# Altium PCB dualPSUpcb.PcbDoc
Units mm, origin at the board's own origin, x right, y up, seen from the top; angles counter-clockwise.
Board outline 73.5 x 47.5 mm, 2 copper layers (Top Layer, Bottom Layer), stack 1.569 mm thick; 33 components, 16 nets, 108 pads, 16 vias.
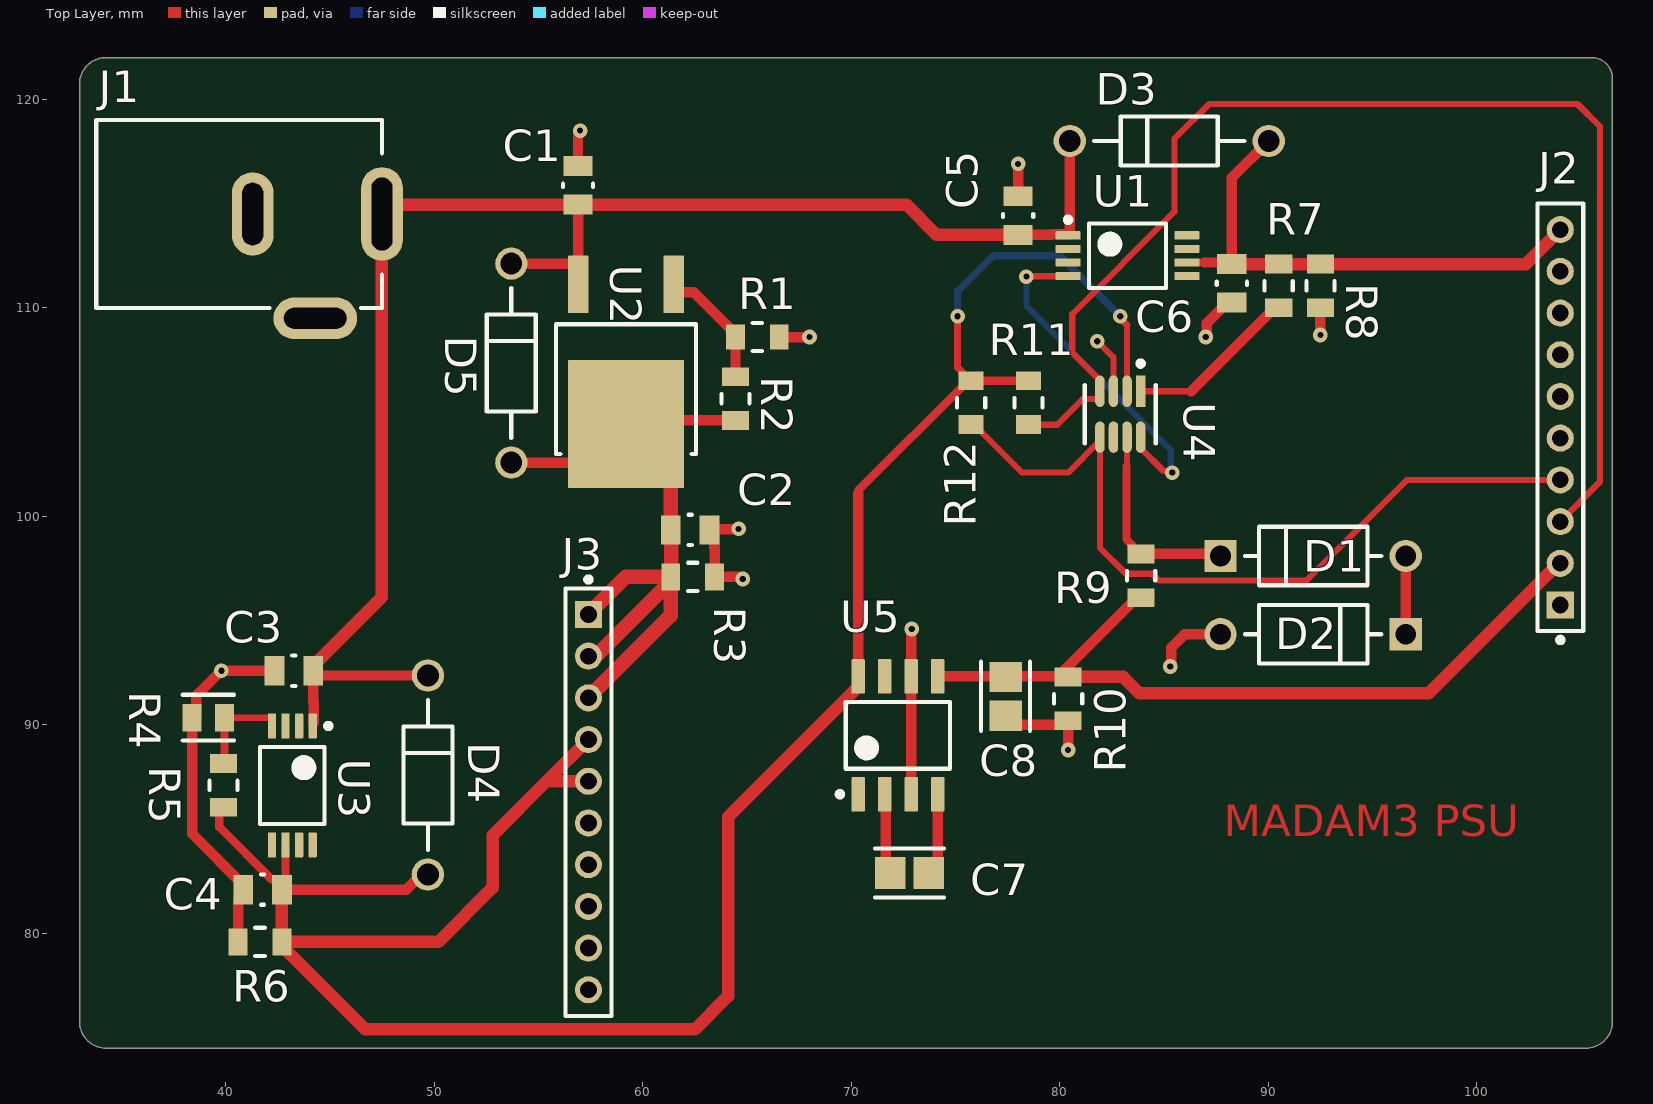
[diagram p0: Top Layer view]
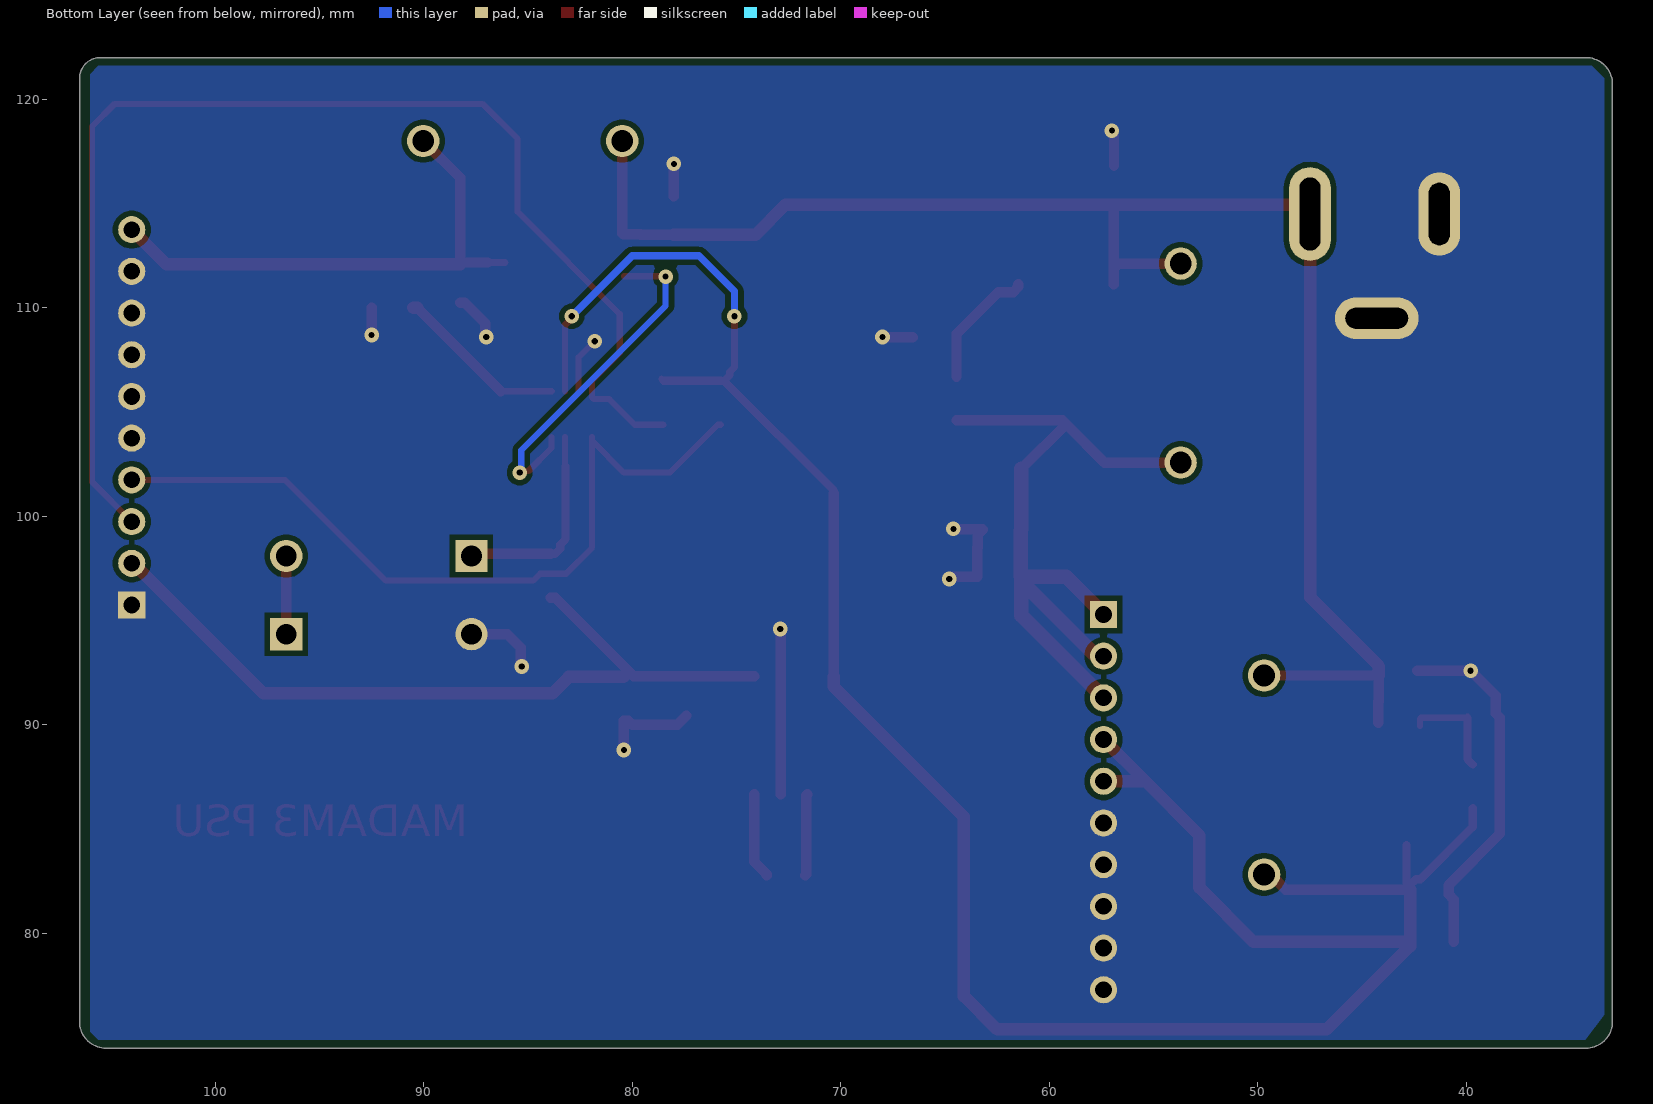
[diagram p1: Bottom Layer view, seen from below]
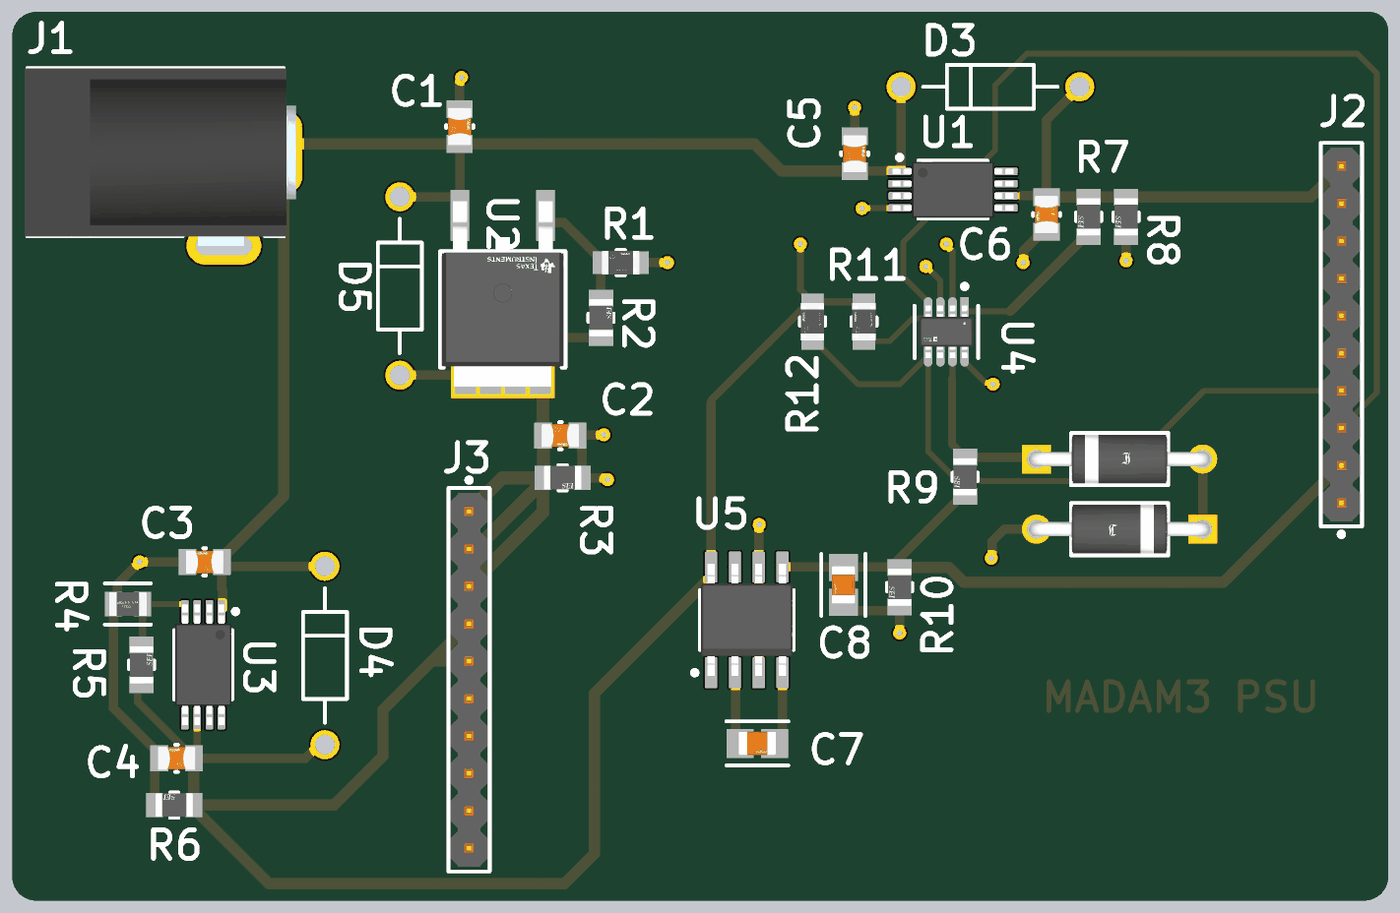
[diagram p2: 3D render of the assembled board from above, using the file's embedded part models]

## Layer stack, top to bottom
Top Solder: solder mask 0.0254, SM-001, Dk 4
Top Layer: signal copper 0.035
Dielectric 1: core 1.4986, Core-043, Dk 4.3
Bottom Layer: signal copper 0.035
Bottom Solder: solder mask 0.0254, SM-001, Dk 4

## Board outline
33,75.77 33,120.73 cw(c34.27,120.73) 34.27,122 105.5,122 cw(c105.5,121) 106.5,121 106.5,75.77 cw(c105.23,75.77) 105.23,74.5 34.27,74.5 cw(c34.27,75.77)

## Design rules (kind name [scope] priority, off if disabled: settings)
Clearance [All] p1: gap=0.254 ignorepadtopadclearanceinfootprint=TRUE
PolygonConnect [All] p1: connectstyle=Direct reliefconductorwidth=0.254 reliefentries=4 polygonreliefangle="90 Angle" airgapwidth=0.254
RoutingVias [All] p1: holewidth=0.3 width=0.7 viastyle="Through Hole" minholewidth=0.25 minwidth=0.55 maxholewidth=0.4 maxwidth=0.9
SolderMaskExpansion [All] p1: expansion=0.102 istentingtop=FALSE
SupplyNets "Schematic Supply Nets_5" [InNet('+12')] p1: voltage=0.000
SupplyNets "Schematic Supply Nets_4" [InNet('-5')] p2: voltage=0.000
SupplyNets "Schematic Supply Nets_3" [InNet('+5')] p3: voltage=0.000
SupplyNets "Schematic Supply Nets_2" [InNet('+3.3')] p4: voltage=0.000
SupplyNets "Schematic Supply Nets_1" [InNet('+Vout')] p5: voltage=0.000
SupplyNets "Schematic Supply Nets" [InNet('GND')] p6: voltage=0.000
UnRoutedNet [All] p1: checkbadconnections=TRUE
Width [All] p1: maxlimit=1 minlimit=0.2 preferedwidth=0.3 minimp=50.000000 maximp=50.000000 favimp=50.000000
29 further rules are at their usual default settings.

## Components (designator, comment, footprint, x,y, rotation, side; value= is the part's Value field where it differs from the comment)
C1 "100nF" FP-CC0805-0_85-MFG 56.9,115.875 r90 top value="100 nF"
C2 "1uF" FP-CC0805-0_85-MFG 62.275,99.35 r0 top value="1 uF"
C3 "100nF" FP-CC0805-0_85-MFG 43.275,92.6 r180 top value="100 nF"
C4 "1u" FP-CC0805-0_85-MFG 41.775,82.1 r180 top value="1 uF"
C5 "100nF" FP-CC0805-0_85-MFG 78,114.425 r90 top value="100 nF"
C6 "1u" FP-CC0805-0_85-MFG 88.25,111.175 r270 top value="1 uF"
C7 "47uF" FP-GRM21B-0_2-e0_2_0_7-IPC_A 72.8,82.9 r0 top
C8 "47uF" FP-GRM21B-0_2-e0_2_0_7-IPC_A 77.4,91.374 r270 top
D1 "1N4007" FP-1N4007-MFG 92.15,98.1 r0 top value=15pF
D2 "1N4007" FP-1N4007-MFG 92.15,94.35 r180 top value=15pF
D3 "1N4002" ONSC-AXIAL_LEAD-2-59-10_P 85.25,118 r0 top
D4 "1N4002" ONSC-AXIAL_LEAD-2-59-10_P 49.7,87.6 r270 top
D5 "1N4002" ONSC-AXIAL_LEAD-2-59-10_P 53.7,107.35 r270 top
J1 "KLDX-0202-B" KYCN-KLDX-0202-B_V 33.8,114.5 r0 top
J2 "NRPN101PAEN-RC" FP-NRPN101PAEN-RC-MFG 104,104.75 r90 top
J3 "NRPN101PAEN-RC" FP-NRPN101PAEN-RC-MFG 57.4,86.3 r270 top
R1 "1650" FP-RT0805-MFG 65.5,108.6 r0 top value=1.65KΩ
R2 "1k" FP-RMCF0805-MFG 64.45,105.65 r90 top
R3 "1k" FP-RMCF0805-MFG 62.4,97.1 r0 top
R4 "3.3k" FP-CRGCQ0805-IPC_C 39.174,90.35 r180 top value=3.3KΩ
R5 "1k" FP-RMCF0805-MFG 39.9,87.1 r90 top
R6 "1k" FP-RMCF0805-MFG 41.65,79.6 r180 top
R7 "1k" FP-RMCF0805-MFG 90.5,111.05 r270 top
R8 "1k" FP-RMCF0805-MFG 92.5,111.05 r270 top
R9 "1k" FP-RMCF0805-MFG 83.9,97.15 r270 top
R10 "1k" FP-RMCF0805-MFG 80.4,91.25 r270 top
R11 "10k" FP-RT0805-MFG 78.5,105.45 r90 top value=10KΩ
R12 "10k" FP-RT0805-MFG 75.75,105.45 r90 top value=10KΩ
U1 "LM317LCPW" PW0008A_L 83.25,112.5 r0 top
U2 "LM317MKVURG3" FP-KVU0003A-MFG 59.2,106.1 r180 top
U3 "LM317LCPW" PW0008A_L 43.2,87.1 r270 top
U4 "AD5245BRJZ10-RL7" FP-RJ-8-IPC_B 82.9,104.9 r270 top
U5 "LM2662MX/NOPB" D0008A_M 72.237,89.501 r90 top

## Footprints (in the part's own frame and the unit in brackets; to place one, negate y for a bottom-side part, rotate by r counter-clockwise, add the part's x,y. Pads: shape width x height; smd on the part's side, far side on the other; paste and mask are expansions set on the pad)
D0008A_M [mm] "SOIC, 8-Leads, Body 5x4mm, Pitch 1.27mm, IPC Low Density"
  rrect15% 1.65x0.65 smd: 1(-2.825,1.905) 2(-2.825,0.635) 3(-2.825,-0.635) 4(-2.825,-1.905) 5(2.825,-1.905) 6(2.825,-0.635) 7(2.825,0.635) 8(2.825,1.905)
  silkscreen extent -2.95,-2.5 1.6,2.9, body extent -3,-2.45 3,2.45, height 1.63
FP-1N4007-MFG [mm]
  rect 1.55x1.55 hole 1 paste-2539.97 mask+0: 1(-4.44,0)
  round 1.55 hole 1 paste-2539.97 mask+0: 2(4.44,0)
  silkscreen extent -3.26,-1.4 3.26,1.4, body extent -5.32,-1.5 5.32,1.5, height 0.25
FP-CC0805-0_85-MFG [mm]
  rect 0.95x1.4 smd paste+0 mask+0: 1(-0.925,0) 2(0.925,0)
  silkscreen extent -0.07,-0.72 0.08,0.72, body extent -1.6,-1.05 1.6,1.05, height 0.25
FP-CRGCQ0805-IPC_C [mm]
  rect 0.906x1.31 smd paste+0 mask+0: 1(-0.776,0) 2(0.776,0)
  silkscreen extent -1.23,-1.1 1.23,1.1, body extent -1.33,-0.8 1.33,0.8, height 0.25
FP-GRM21B-0_2-e0_2_0_7-IPC_A [mm]
  rect 1.455x1.556 smd paste+0 mask+0: 1(-0.926,0) 2(0.926,0)
  silkscreen extent -1.65,-1.18 1.65,1.18, body extent -2.15,-1.28 2.15,1.28, height 0.25
FP-KVU0003A-MFG [mm]
  rrect10% 1x2.75 smd paste+0 mask+0: 1(-2.29,-5.025) 3(2.29,-5.025)
  rrect2% 5.55x6.15 smd paste-1000 mask+0: 4(0,1.675)
  silkscreen extent -3.35,-3.11 3.35,3.11, body extent -3.45,-6.5 3.45,4.85, height 0.25
FP-NRPN101PAEN-RC-MFG [mm]
  rect 1.3x1.3 hole 0.8 paste-2539.97 mask+0: 1(-9,0)
  round 1.3 hole 0.8 paste-2539.97 mask+0: 2(-7,0) 3(-5,0) 4(-3,0) 5(-1,0) 6(1,0) 7(3,0) 8(5,0) 9(7,0) 10(9,0)
  silkscreen extent -10.8,-1.1 10.25,1.1, body extent -10.35,-1.2 10.35,1.2, height 0.25
FP-RJ-8-IPC_B [mm]
  rect 1.505x0.455 smd paste+0 mask+0: 1(-1.1,0.975)
  rrect100% 1.505x0.455 smd paste+0 mask+0: 2(-1.1,0.325) 3(-1.1,-0.325) 4(-1.1,-0.975) 5(1.1,-0.975) 6(1.1,-0.325) 7(1.1,0.325) 8(1.1,0.975)
  silkscreen extent -2.55,-1.7 1.4,1.7, body extent -2.1,-1.7 2.1,1.7, height 0.25
FP-RMCF0805-MFG [mm]
  rect 0.9x1.3 smd paste+0 mask+0: 1(-1.05,0) 2(1.05,0)
  silkscreen extent -0.22,-0.68 0.23,0.67, body extent -1,-0.63 1,0.63, height 0.65
FP-RT0805-MFG [mm]
  rect 0.9x1.2 smd paste+0 mask+0: 1(-1.05,0) 2(1.05,0)
  silkscreen extent -0.23,-0.68 0.23,0.67, body extent -1.6,-0.77 1.6,0.77, height 0.25
KYCN-KLDX-0202-B_V [mm] "3 Conductor Jack, 9 x 14.5 mm Body"
  oval 2x4.5 hole 1 slot 3.5 at 90 deg: 1(13.7,0)
  oval 2x4 hole 1 slot 3 at 90 deg: 2(7.5,0)
  oval 4x2 hole 1 slot 3 at 0 deg: 3(10.5,-5)
  silkscreen extent 0,-4.5 13.7,4.5, body extent -0.15,-5 14.35,4.5, height 11
ONSC-AXIAL_LEAD-2-59-10_P [mm] "AXIAL, 2-Leads, Diameter 2.35mm"
  round 1.55 hole 1.05: 1(-4.77,0) 2(4.77,0)
  silkscreen extent -3.6,-1.17 3.6,1.18
PW0008A_L [mm] "SOP, 8-Leads, Body 4.5x3.1mm, Pitch 0.65mm, IPC High Density"
  rrect25% 1.2x0.4 smd: 1(-2.85,0.975) 2(-2.85,0.325) 3(-2.85,-0.325) 4(-2.85,-0.975) 5(2.85,-0.975) 6(2.85,-0.325) 7(2.85,0.325) 8(2.85,0.975)
  silkscreen extent -2.97,-1.55 1.85,1.85, body extent -3.23,-1.5 3.23,1.5, height 1.2

## Part data
C1 C3 C5: library part CMP-03422-000691-1, "CAP CER 0.1UF 25V X7R 0805", Capacitance="100 nF", Manufacturer=Yageo, Manufacturer Part Number=CC0805MRX7R8BB104, Package=CC0805-0.85, Temperature="-30°C to +85°C", Temperature Characteristic=X7R, Temperature Range High=+85°C, Temperature Range Low=-30°C, Tolerance=0.2, Voltage Rating="25 V", Automotive=No, Category=Cap, ComponentLink2Description=Datasheet, ComponentLink2URL=http://www.yageo.com/documents/recent/UPY-GPHC_Y5V_6.3V-to-50V_8.pdf, Device Class L1="Passive Components", Device Class L2=Capacitors, Device Class L3="Ceramic Capacitors", Digikey Description="CAP CER 0.1UF 25V X7R 0805", Footprint Url=http://www.yageo.com/exep/pages/download/literatures/UPY-C_GEN_24.pdf, Height=0.95mm, Ipc Land Pattern Name=CAPC200125X85, Lead Free=Yes, Material=Ceramic, Mouser Description="Multilayer Ceramic Capacitors MLCC - SMD/SMT 100nF 25V X7R 20%", Octopart=https://octopart.com/cc0805mrx7r8bb104-yageo-25629596, RoHS=TRUE
C2 C4 C6: library part CMP-03422-000816-1, "CAP CER 1UF 6.3V X5R 0805", Capacitance="1 uF", Manufacturer=Yageo, Manufacturer Part Number=CC0805KKX5R5BB105, Package=CC0805-0.85, Temperature="-30°C to +85°C", Temperature Characteristic=X5R, Temperature Range High=+85°C, Temperature Range Low=-30°C, Tolerance=0.1, Voltage Rating="6.3 V", Automotive=No, Category=Cap, ComponentLink2Description=Datasheet, ComponentLink2URL=http://www.yageo.com/documents/recent/UPY-GPHC_Y5V_6.3V-to-50V_8.pdf, Device Class L1="Passive Components", Device Class L2=Capacitors, Device Class L3="Ceramic Capacitors", Digikey Description="CAP CER 1UF 6.3V X5R 0805", Footprint Url=http://www.yageo.com/exep/pages/download/literatures/UPY-C_GEN_24.pdf, Height=0.95mm, Ipc Land Pattern Name=CAPC200125X85, Lead Free=Yes, Material=Ceramic, Octopart=https://octopart.com/cc0805kkx5r5bb105-yageo-71334571, RoHS=TRUE
C7 C8: library part CMP-2000-06341-2, "Chip Multilayer Ceramic Capacitors for General Purpose, 0805, 47uF, X5R, 15%, 20%, 10V", Case Code (Imperial)=0805, Case Code (Metric)=2012, Dielectric=X5R, Dielectric Material=Ceramic, Max Operating Temperature=85°C, Min Operating Temperature=-55°C, Tolerance=20%, Voltage=10V, Capacitance=47uF, Case/Package=0805, Depth=1.25mm, Dissipation Factor=0.035%, Height=1.25mm, Lead Free="Lead Free", Length=2mm, Mount="Surface Mount", Packaging="Tape and Reel", REACH SVHC="No SVHC", Termination=SMD/SMT, Thickness=0.057inch, Voltage Rating=10V, Voltage Rating (DC)=10V, Width=0.049inch
D1 D2: library part CMP-123542-000001-1, "Rectifier diode 1000 V 1 A DO-41, ,", Capacitance=15pF, Forward Current=1A, Manufacturer=Diotec, Max Junction Temp=+175°C, Max Repetitive Reverse Voltage=1000V, Max Surge Forward Current=27A, Peak Reverse Current=5uA, Temperature="-50°C to +175°C", Temperature Range Low=-50°C, Automotive=No, Category=Diode, ComponentLink2Description=Datasheet, ComponentLink2URL=https://datasheet.octopart.com/1N4007-Diotec-datasheet-62346875.pdf, Device Class L1="Discrete Semiconductors", Device Class L2=Diodes, Device Class L3="Rectifier Diodes", Height=2.8mm, Ipc Land Pattern Name=DIOAD888W100L520D280, Lead Free=Yes, Manufacturer Part Number=1N4007, Octopart=https://octopart.com/1n4007-diotec-4040411, Package=1N4007, Reverse Voltage=1000V, RoHS=TRUE, Temperature Range High=+175°C
D3 D4 D5: library part CMP-0902-00207-1, "Standard Recovery Rectifier, 2-Pin Axial_Lead, Pb-Free, Bulk Bag", Manufacturer="On Semiconductor", ComponentLink1Description="Manufacturer URL", ComponentLink1URL=http://www.onsemi.com/, ComponentLink2Description=Datasheet, ComponentLink2URL=http://www.onsemi.com/pub_link/Collateral/1N4001-D.PDF, ComponentLink3Description="Package Specification", ComponentLink3URL=http://www.onsemi.cn/pub_link/Collateral/59-10.PDF, DatasheetVersion="Rev. 13", IFSM Max (A)=30, IO(rec) Max (A)=1, Mounting Technology="Through Hole", PackageDescription="2-Pin, Axial Lead, Diameter 2.35 mm", PackageReference=AXIAL_LEAD-2-59-10, PackageVersion="Rev. U, 02/2005", Packing="Bulk Bag", PartNumber=1N4002, RoHS=TRUE, Type="Standard Recovery", VRRM Max (V)=100
J1: library part CMP-0256-00001-1, "3 Conductor Power Jack, 2 break 2 aux contacts", ComponentLink1Description="Manufacturer URL", ComponentLink1URL=http://kycon.com/, ComponentLink2Description=Datasheet, ComponentLink2URL=http://anacapa.kycon.com/Catalog_PDF/KLDX_0202.pdf, Contact Finish=Brass, Mounting Technology="Through Hole", PackageDescription="Jack, 9 x 14.5 mm Body, 2.5 mm Center Pin Diameter", PackageReference=KLDX-0202-B, PartNumber=KLDX-0202-B
J2 J3: library part CMP-25680-000006-1, "CONN HEADER VERT 10POS 2MM", Current Rating=2A, Manufacturer=Sullins, Package=0, Temperature="-40°C to +105°C", Temperature Range High=+105°C, Temperature Range Low=-40°C, Voltage Rating=150V, Automotive=No, Category=Conn, ComponentLink2Description=Datasheet, ComponentLink2URL=https://s3.amazonaws.com/catalogspreads-pdf/PAGE104-105%202mm%20MALE%20HDR%20ST%20RA%20SMT.pdf, Conn Gender=Male, Conn Orientation=Straight, Contact Material=Gold,Nickel, Device Class L1=Connectors, Device Class L2="Headers and Wire Housings", Device Class L3=unset, Digikey Description="CONN HEADER VERT 10POS 2MM", Footprint Url=https://drawings-pdf.s3.amazonaws.com/10531.pdf, Height=5.95mm, Lead Free=Yes, Manufacturer Part Number=NRPN101PAEN-RC, Number Of Contacts=10, Number Of Rows=1, Octopart=https://octopart.com/nrpn101paen-rc-sullins-18674398, Pitch=2mm, RoHS=TRUE
R1: library part CMP-03412-005070-1, "RES SMD 1.65K OHM 1% 1/8W 0805", Manufacturer=Yageo, Manufacturer Part Number=RT0805FRE071K65L, Package=RT0805, Power Rating=0.125W, Resistance=1.65KΩ, Temperature="-55°C to +155°C", Temperature Coefficient="50 ppm/°C", Temperature Range High=+155°C, Temperature Range Low=-55°C, Tolerance=0.0001, Voltage Rating=150V, Automotive=No, Category=Res, ComponentLink2Description=Datasheet, ComponentLink2URL=http://www.yageo.com/documents/recent/PYu-RT_1-to-0.01_RoHS_L_9.pdf, Composition="Thin Film", Device Class L1="Passive Components", Device Class L2=Resistors, Device Class L3="Chip SMD Resistors", Digikey Description="RES SMD 1.65K OHM 1% 1/8W 0805", Footprint Url=http://www.yageo.com/exep/pages/download/literatures/PYu-R_Mount_10.pdf, Height=0.6mm, Ipc Land Pattern Name=RESC200125X50, Lead Free=Yes, Mouser Description="Thin Film Resistors - SMD 1/8W 1.65K ohm 1% 50ppm", Octopart=https://octopart.com/rt0805fre071k65l-yageo-1226722, RoHS=TRUE, Series=RT
R2 R3 R5 R6 R7 R8 R9 R10: library part CMP-26527-002945-1, "1kΩ ±1% 0.125W 0805 Thick Film Chip Resistor AEC-Q200 compliant", Case/Package=0805, Max Operating Temperature=155°C, Max Power Dissipation=125mW, Min Operating Temperature=-55°C, Resistance=1kR, Resistor Type="Thick Film", Temperature Coefficient=100ppm/°C, Tolerance=1%, Construction=Rectangular, Contact Plating=Tin, Depth=1.25mm, Features="Automotive AEC-Q200", Height=0.026inch, Lead Free="Lead Free", Length=2mm, Military Standard=Not, Mount="Surface Mount", Number of Terminations=2, Packaging="Tape and Reel", Radiation Hardening=No, RoHS Compliant=Yes, Series=RMCF, Width=0.049inch
R4: library part CMP-03211-009851-1, "CRGCQ0805 3.3KΩ 0.125W ±100ppm/°C 5% 150V", Ambient Temperature Range High=+70°C, Manufacturer="TE Connectivity", Manufacturer Part Number=CRGCQ0805J3K3, Package=CRGCQ0805, Power Rating=0.125W, Resistance=3.3KΩ, Temperature="-55°C to +155°C", Temperature Coefficient=±100ppm/°C, Temperature Range High=+155°C, Temperature Range Low=-55°C, Tolerance=0.05, Voltage Rating=150V, Automotive=Yes, Automotive Grade="Grade 800", Category=Res, ComponentLink2Description=Datasheet, ComponentLink2URL=https://www.te.com/commerce/DocumentDelivery/DDEController?Action=showdoc&DocId=Data+Sheet%7F1773204-3%7F1%7Fpdf%7FEnglish%7FENG_DS_1773204-3_1.pdf%7F4-2176341-809, Composition="Thick Film", Device Class L1="Passive Components", Device Class L2=Resistors, Device Class L3="Chip SMD Resistors", Height=0.65mm, Ipc Land Pattern Name=RESC200125X55, Lead Free=Yes, Octopart=https://octopart.com/crgcq0805j3k3-te+connectivity-91018225, RoHS=TRUE, Series=CRGCQ
R11 R12: library part CMP-03412-035478-1, "RES SMD 10K OHM 1% 1/8W 0805", Manufacturer=Yageo, Manufacturer Part Number=RT0805FRD0710KL, Package=RT0805, Power Rating=0.125W, Resistance=10KΩ, Temperature="-55°C to +155°C", Temperature Coefficient="25 ppm/°C", Temperature Range High=+155°C, Temperature Range Low=-55°C, Tolerance=0.0001, Voltage Rating=150V, Automotive=No, Category=Res, ComponentLink2Description=Datasheet, ComponentLink2URL=http://www.yageo.com/documents/recent/PYu-RT_1-to-0.01_RoHS_L_9.pdf, Composition="Thin Film", Device Class L1="Passive Components", Device Class L2=Resistors, Device Class L3="Chip SMD Resistors", Digikey Description="RES SMD 10K OHM 1% 1/8W 0805", Footprint Url=http://www.yageo.com/exep/pages/download/literatures/PYu-R_Mount_10.pdf, Height=0.6mm, Ipc Land Pattern Name=RESC200125X50, Lead Free=Yes, Octopart=https://octopart.com/rt0805frd0710kl-yageo-71399701, RoHS=TRUE, Series=RT
U1 U3: library part CMP-0324-00206-3, "Adjustable Regulator with 3.7 to 38 V Input and 1.2 to 32 V Output, 0 to 125 degC, 8-Pin TSSOP (PW), Green (RoHS & no Sb/Br)", Manufacturer="Texas Instruments", Code_JEDEC=MO-153, ComponentLink1Description=Datasheet, ComponentLink1URL=http://www.ti.com/general/docs/lit/getliterature.tsp?genericPartNumber=LM317L&fileType=pdf, ComponentLink2Description="Package Specification", ComponentLink2URL=http://www.ti.com/litv/pdf/mtss001d, ComponentLink3Description="URL Link1", ComponentLink3URL="Samples URL:http://www.ti.com/product/lm317l#samples", DatasheetVersion=SLCS144D, Eco-Plan="Green (RoHS & no Sb/Br)", Iout(Max)(A)=0.1, Mounting Technology="Surface Mount", PackageDescription="8-Pin Plastic Thin Small Outline Package 3 x 4.4 mm Body ,0.65 mm Pitch", PackageReference=PW0008A, PackageVersion="revG, Feb-2011", PartNumber=LM317LCPW, Vin(Max)(V)=38, Vin(Min)(V)=3.7, Vout(Max)(V)=32, Vout(Min)(V)=1.2
U2: library part CMP-04917-000136-1, "IC REG LIN POS ADJ 500MA TO252-3", Case/Package=TO-252-3, Dropout Voltage=2V, Max Input Voltage=40V, Max Operating Temperature=125°C, Max Output Current=500mA, Max Output Voltage=37V, Min Input Voltage=4.2V, Min Operating Temperature=-40°C, Min Output Voltage=1.25V, Package Quantity=2500, Power Supply Rejection Ratio (PSRR)=80dB, Quiescent Current=3.5mA, Reference Voltage=1.3V, Contact Plating=Tin, Height=2.39mm, Lead Free="Lead Free", Length=6.7mm, Min Current Limit=500mA, Mount="Surface Mount", Number of Outputs=1, Number of Pins=3, Number of Regulators=1, Output Current=500mA, Output Type=Adjustable, Output Voltage=37V, Packaging="Tape and Reel", Polarity=Positive, Radiation Hardening=No, REACH SVHC="No SVHC", RoHS Compliant=Yes, Weight=0.011598oz, Width=6.22mm
U4: library part CMP-09083-000109-1, "IC DGT POT 10KOHM 256TAP SOT23-8", Case/Package=SOT-23, Frequency=400kHz, Max Operating Temperature=125°C, Max Supply Current=3uA, Max Supply Voltage=5.5V, Min Operating Temperature=-40°C, Min Supply Voltage=2.7V, Package Quantity=3000, Resistance=10kR, Resistance Tolerance=30%, Temperature Coefficient=45ppm/°C, -3db Bandwidth=1.2MHz, Contact Plating=Gold, Interface=I2C, Lead Free="Contains Lead", Memory Type=Volatile, Mount="Surface Mount", Nominal Supply Current=3uA, Number of Circuits=1, Number of Elements=1, Number of Pins=8, Number of Positions=256, Number of Taps=256, Operating Supply Current=3uA, Operating Supply Voltage=5.5V, Packaging="Tape and Reel", Quiescent Current=3uA, Radiation Hardening=No, REACH SVHC="No SVHC", RoHS Compliant=Yes, Series=-, Supply Current=3uA, Taper=Linear, Tolerance=30%
U5: library part CMP-0065-00025-3, "Switched Capacitor Voltage Converter, 8-pin Narrow SOIC, Pb-Free", Manufacturer="Texas Instruments", PackageTopMarking=NSZXTT*LM26*62M, PowerWise=N, Code_IPC=SOIC127P600-8, Code_JEDEC=MS-012-AA, ComponentLink1Description="Datasheet URL", ComponentLink1URL=http://www.ti.com/general/docs/lit/getliterature.tsp?genericPartNumber=LM2662&fileType=pdf, CompType="Switch Caps", PackageDescription="SOIC Narrow, 4.9 x 3.9 x 1.45mm, 8 Lead, 1.27mm Pitch", PackageReference=D0008A, PinCount=8, RoHS=Y

## Via types
v1: diameter 0.7, hole 0.3, Top Layer to Bottom Layer, 16 vias

## Nets (pads, with @x,y where several pads share a name; then routed paths per layer and width w, separated by ;. In a path a pad name is that pad's centre, name@x,y a point inside that pad or via, vN(x,y) a via of type N, cw(c..) or ccw(c..) an arc to the next point about the centre after c; other vN are vias at no path point)
+3.3: C2.1 D5.2 J3.1 J3.2 J3.3 R2.1 R3.1 U2.4 | length 37.5
  Top Layer w0.5: D5.2 57.355,102.58 U2.4 ; U2.4@61.35,102.275 U2.4 ; R2.1 59.375,104.6 U2.4
  Top Layer w0.7: J3.3 61.35,95.25 R3.1 ; J3.2 57.515,93.415 57.865,93.415 61.35,96.9 R3.1 ; J3.1 59.2,97.1 R3.1 ; C2.1 U2.4@61.35,102.275 ; R3.1@61.371,97.121 C2.1@61.371,99.329
+5: C4.1 D4.2 J3.4 J3.5 R5.1 R6.1 R11.2 R12.2 U3.6 U4.2 U5.8 | length 118.4
  Top Layer w0.3: C4.1 C4.1@42.875,82.275 ; R11.2 R11.2@78.6,106.6 ; U4.2 83.225,109.18
  Top Layer w0.35: v1(75.1,109.6) 75.1,107.15 75.325,106.925 75.325,106.775 75.6,106.5 R12.2 ; v1(82.9,109.6) 82.9,109.505 83.225,109.18
  Top Layer w0.38: C4.1@42.875,82.275 U3.6
  Top Layer w0.4: R5.1@39.7,86 39.7,85.1 42.2,82.6 42.425,82.6 C4.1@42.7,82.325 ; C4.1 C4.1@42.875,82.1 ; D4.2@49.389,82.83 D4.2 ; 70.332,101.082 70.332,101.232 R12.2@75.6,106.5 ; R12.2 R11.2
  Top Layer w0.5: C4.1@42.875,82.1 48.659,82.1 D4.2@49.389,82.83 ; U5.8 70.332,101.082
  Top Layer w0.6: C4.1 R6.1 ; J3.5 55.4,87.3 ; J3.4 55.4,87.3 ; U5.8 70.332,91.826 64.1,85.594 64.1,77 62.5,75.4 46.7,75.4 42.7,79.4 R6.1 ; R6.1 50.2,79.6 52.8,82.2 52.8,84.7 55.4,87.3
  Bottom Layer w0.35: v1(75.1,109.6) 75.1,110.8 76.8,112.5 80,112.5 v1(82.9,109.6)
+12: C1.1 C3.1 C5.1 D3.1 D4.1 D5.1 J1.1 U1.1 U2.3 U3.1 | length 78.1
  Top Layer w0.35: 79.621,113.487 80.388,113.487 U1.1
  Top Layer w0.5: C3.1@44.2,92.37 44.2,91.14 44.229,91.11 U3.1@44.229,90.1 ; C3.1@44.312,92.482 44.425,92.37 D4.1 ; D5.1 56.66,112.12 56.91,111.87 U2.3 56.905,111.13 56.905,114.945 C1.1 ; C5.1 79.592,113.5 79.621,113.529 80.429,113.529 80.48,113.58 D3.1
  Top Layer w0.6: C3.1@44.2,92.37 44.2,92.825 47.5,96.125 J1.1 47.95,114.95 C1.1 72.65,114.95 74.1,113.5 C5.1
+Vout: C6.1 D3.2 J2.10 R7.1 R8.1 U1.6 | length 25.2
  Top Layer w0.35: U1.6 86.925,112.175
  Top Layer w0.5: 86.925,112.175 88.175,112.175 C6.1 88.25,116.23 D3.2
  Top Layer w0.6: C6.1 R7.1 R8.1 102.35,112.1 J2.10
-5: C8.1 J2.2 R9.2 R10.1 U5.5 | length 37.8
  Top Layer w0.5: U5.5 79.926,92.326 83.7,96.1 R9.2
  Top Layer w0.6: R10.1 83.038,92.3 83.829,91.51 97.676,91.51 103.917,97.75 J2.2
GND: C1.2 C2.2 C3.2 C4.2 C5.2 C6.2 C8.2 D2.2 J1.2 J1.3 J2.1 J2.5 J2.6 J2.7 J2.8 J2.9 J3.6 J3.7 J3.8 J3.9 J3.10 R1.2 R3.2 R4.2 R6.2 R8.2 R10.2 U4.3 U5.3 U5.6 | length 49.8
  Top Layer w0.3: v1(81.802,108.4) 82.575,107.627 U4.3
  Top Layer w0.5: R6.2 40.6,81.625 40.85,81.875 C4.2 40.85,82.325 38.398,84.777 R4.2 38.601,90.553 38.601,91.401 v1(39.8,92.6) C3.2 ; C1.2 56.9,118.346 57,118.446 v1(57,118.5) ; v1(64.6,99.4) 64.575,99.375 63.225,99.375 C2.2 63.425,99.125 63.425,98.525 63.45,98.5 R3.2 64.646,97.1 64.746,97 v1(64.8,97) ; R1.2 v1(68,108.6) ; U5.3 U5.6 72.886,92.34 72.886,94.586 v1(72.9,94.6) ; C8.2 77.848,90 80,90 80.2,90.2 R10.2 v1(80.4,88.8) ; C5.2 v1(78,116.9) ; v1(85.3,92.8) 85.338,92.838 85.338,93.695 85.993,94.35 87.308,94.35 87.509,94.149 D2.2 ; v1(87,108.6) 87.038,108.638 87.038,109.263 88.025,110.25 C6.2 ; v1(92.5,108.7) R8.2
NetC7_1: C7.1 U5.2 | length 3.9
  Top Layer w0.5: U5.2 71.651,86.627 71.651,82.849 C7.1@71.7,82.8
NetC7_2: C7.2 U5.4 | length 4.1
  Top Layer w0.5: C7.2@73.552,82.8 73.552,82.851 74.142,83.441 U5.4
NetD1_1: D1.1 R9.1 U4.7 | length 9.9
  Top Layer w0.3: 83.2,102.4 83.225,102.425 U4.7
  Top Layer w0.4: 83.2,102.4 83.2,98.9 83.45,98.65 83.45,98.45 83.7,98.2 R9.1
  Top Layer w0.5: R9.1 87.61,98.2 D1.1
NetD1_2: D1.2 D2.1 | length 3.8
  Top Layer w0.5: D2.1 D1.2
NetJ2_3: J2.3 R11.1 U4.4 | length 60.2
  Top Layer w0.3: R11.1 79.879,104.4 81.104,105.625 81.853,105.625 81.925,105.697 U4.4 81.925,106.526 80.6,107.851 80.6,109.7 85.5,114.6 85.5,118.1 87.176,119.776 104.824,119.776 105.9,118.7 105.9,101.65 J2.3
NetJ2_4: J2.4 R12.1 U4.5 | length 38
  Top Layer w0.3: R12.1 75.9,104.4 78.2,102.1 80.407,102.1 81.925,103.618 U4.5 81.925,98.504 83.177,97.252 84.42,97.252 84.75,96.921 91.825,96.921 96.654,101.75 J2.4
NetR1_1: R1.1 R2.2 U2.1 | length 6.1
  Top Layer w0.5: U2.1 61.49,111.003 61.74,110.753 62.447,110.753 64.45,108.75 R2.2
NetR4_1: R4.1 R5.2 U3.4 | length 5
  Top Layer w0.3: R4.1 42.175,90.35 42.225,90.3 U3.4
  Top Layer w0.4: R5.2@39.7,88.1 39.95,88.35 R4.1
NetR7_2: R7.2 U4.1 | length 8.3
  Top Layer w0.33: U4.1 86.301,106
  Top Layer w0.5: 86.301,106 R7.2@90.3,110
  Top Layer w0.6: R7.2@90.3,110 R7.2
NetU1_4: U1.4 U4.8 | length 16.8
  Top Layer w0.3: v1(78.4,111.5) 78.412,111.512 80.388,111.512 U1.4 ; U4.8 83.875,103.274 84.973,102.177 85.323,102.177 v1(85.4,102.1)
  Bottom Layer w0.3: v1(78.4,111.5) 78.4,110.1 85.323,103.177 85.323,102.177 v1(85.4,102.1)
pads on no net: U1.2 U1.3 U1.5 U1.7 U1.8 U3.2 U3.3 U3.5 U3.7 U3.8 U4.6 U5.1 U5.7

## Polygon pours and split planes (outlines as drawn)
GND on Bottom Layer "GND_L02_P000" (solid, pour order 0): 33.4,76.1 33.4,121 34,121.6 105.6,121.6 106,121.2 106,75.3 105.6,74.9 34.3,74.9

## Other copper
Top Layer:
  text "MADAM3 PSU" at 87.854,84.654 h1.52

## Silkscreen, mask and mechanical layers (free items; w line width, h text height)
Mechanical 1:
  the board outline again, w0.254